# Altium PCB 175-00003, rev 2, Sinistro ASP.PcbDoc (part 5 of 5)
Units mil, origin at the board's own origin, x right, y up, seen from the top; angles counter-clockwise.
Board outline 5905.51 x 4330.71 mil, 8 copper layers (Top Layer (.GTL), MidLayer1 (.G1), +28V and VCC (.GP1), A and D grounds (.GP2), Earth GND (.GP3), +5ANA (.GP4), -5ANA (.GP5), Bottom Layer (.GBL)); 381 components, 275 nets, 1751 pads, 519 vias.
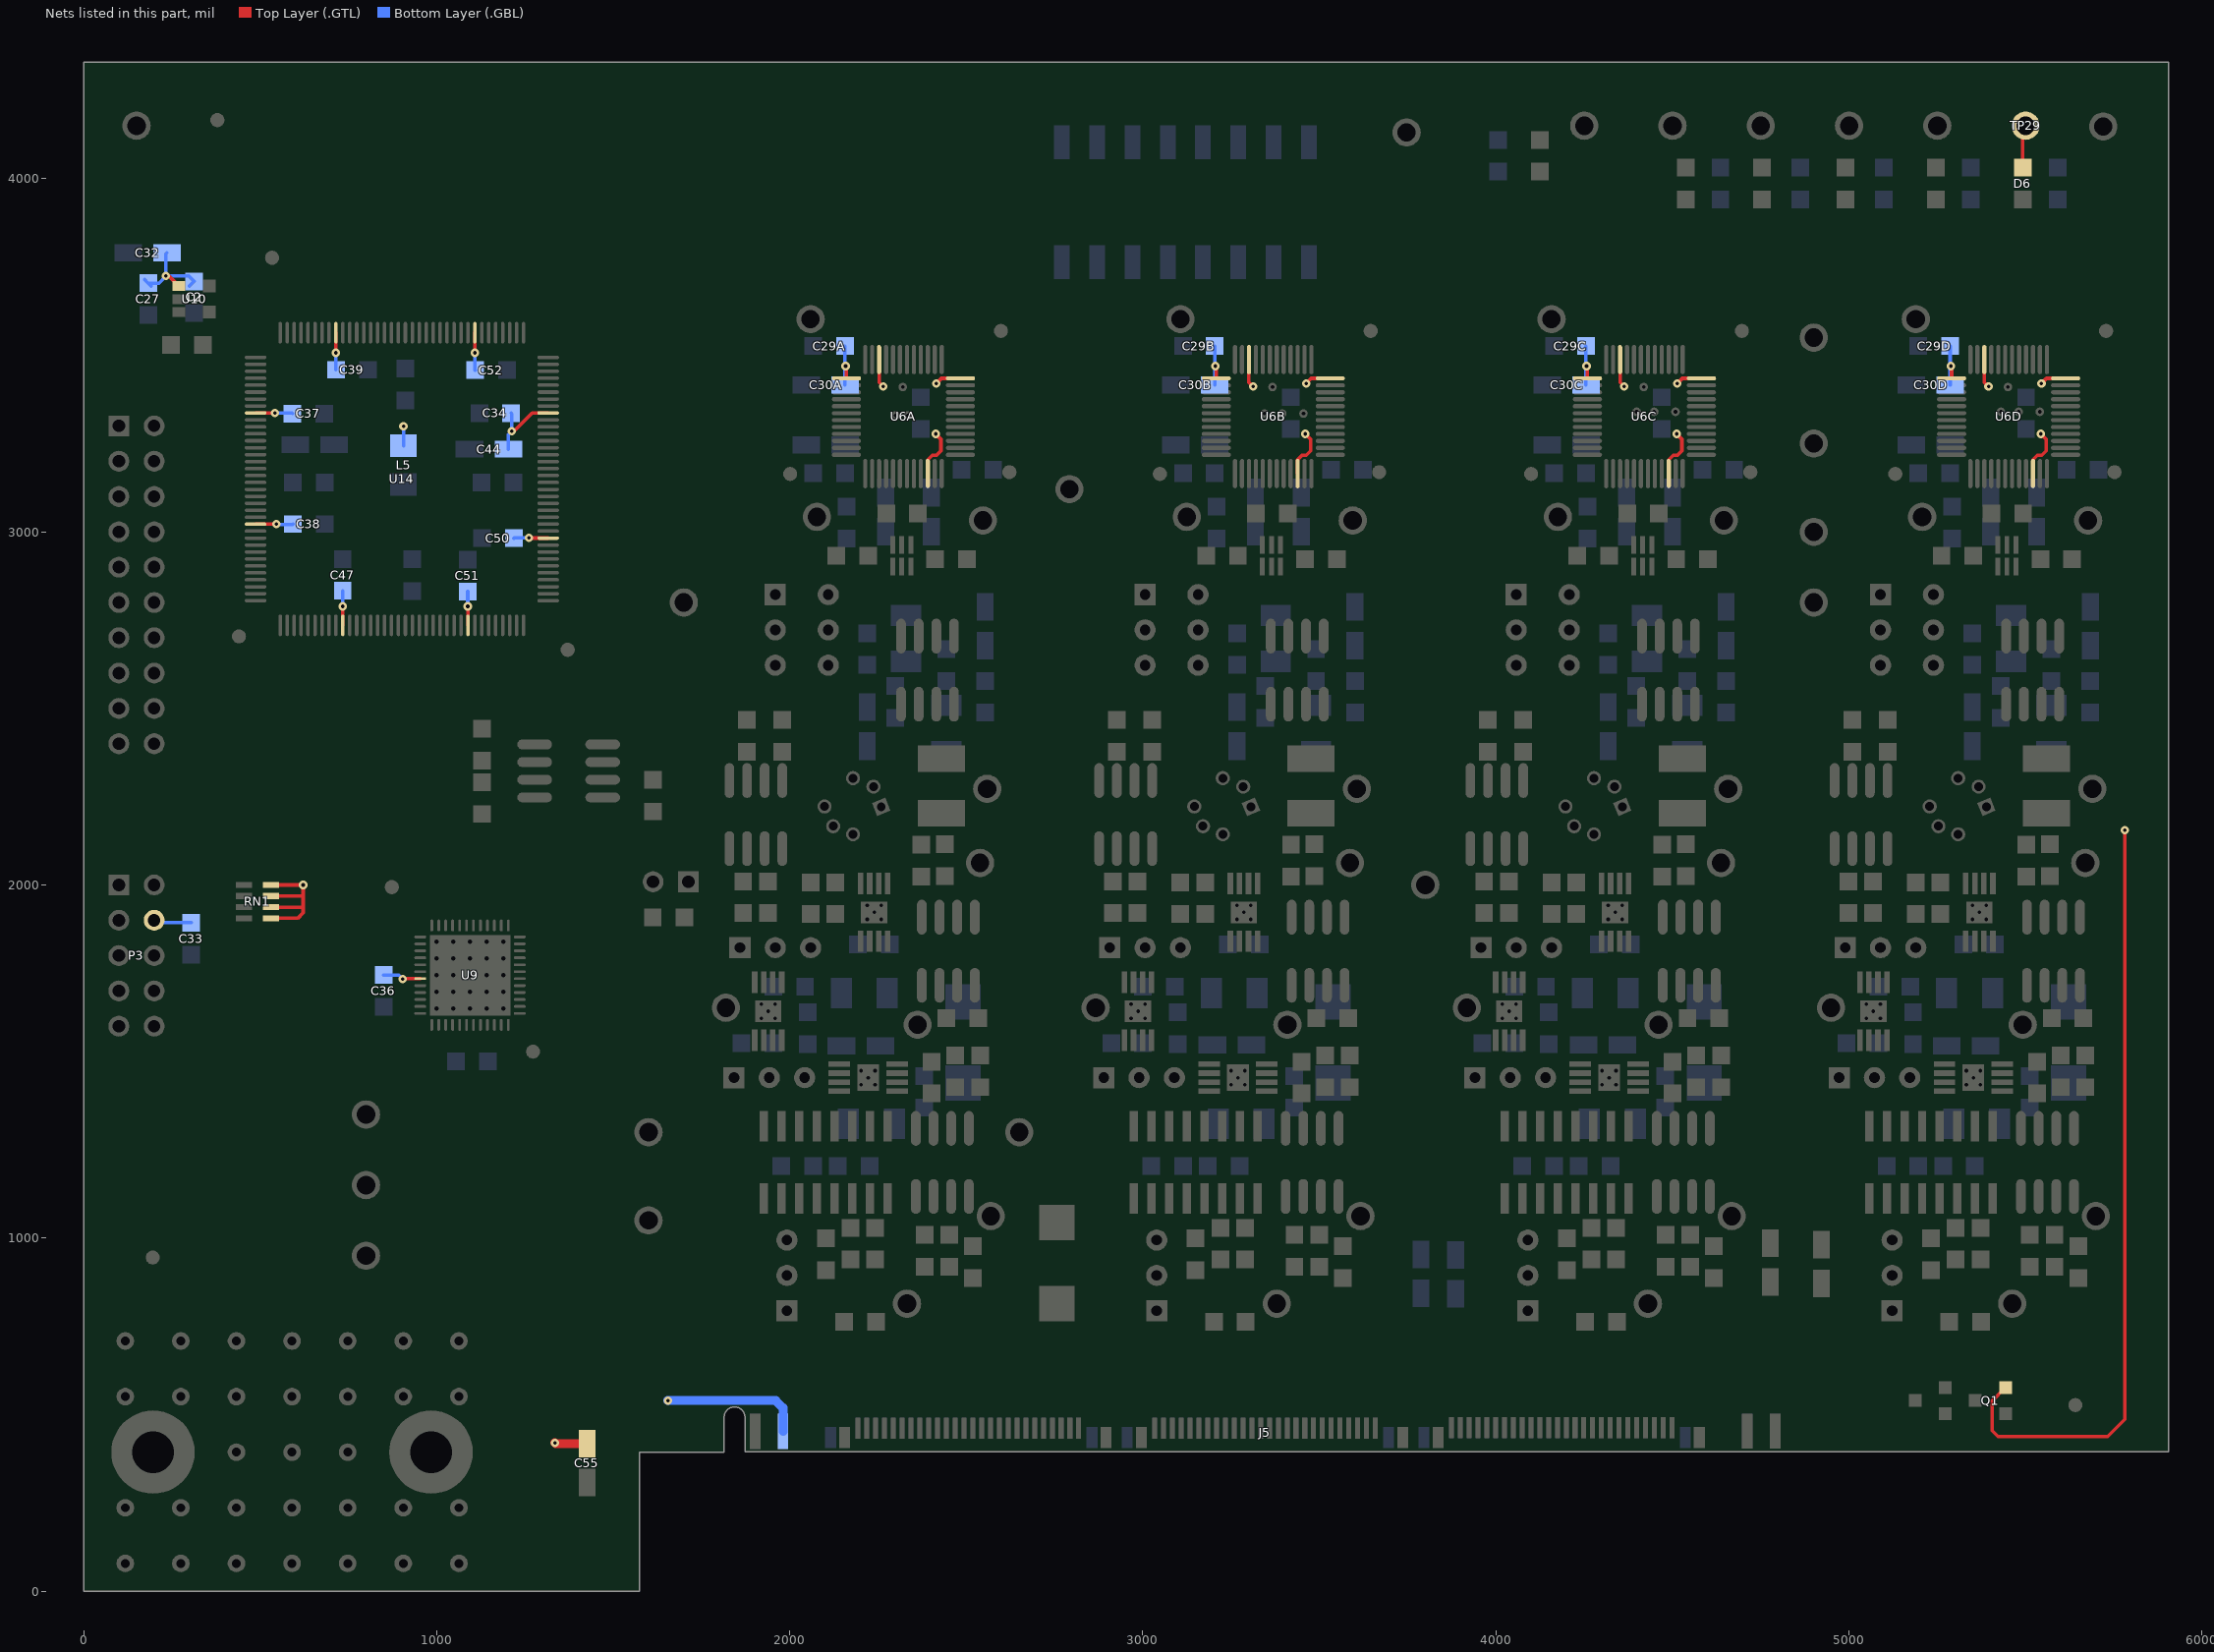
[diagram p11: the nets of this part, all layers, seen from the top]

## Via types
v1: diameter 24, hole 10, Top Layer (.GTL) to Bottom Layer (.GBL), tented both sides, 519 vias

## Nets (pads, with @x,y where several pads share a name; then routed paths per layer and width w, separated by ;. In a path a pad name is that pad's centre, name@x,y a point inside that pad or via, vN(x,y) a via of type N, cw(c..) or ccw(c..) an arc to the next point about the centre after c; other vN are vias at no path point) (continued)
VCC: C2.2 C27.2 C29A.2 C29B.2 C29C.2 C29D.2 C30A.1 C30B.1 C30C.1 C30D.1 C32.1 C33.2 C34.2 C36.2 C37.2 C38.2 C39.2 C44.1 C47.2 C50.2 C51.2 C52.2 C55.1 D6.ANOD J5.PC06 L5.2 P3.4 Q1.2 RN1.2 RN1.4 RN1.6 RN1.8 TP29.1 U6A.10 U6A.24 U6A.34 U6A.37 U6B.10 U6B.24 U6B.34 U6B.37 U6C.10 U6C.24 U6C.34 U6C.37 U6D.10 U6D.24 U6D.34 U6D.37 U9.7 U10.1 U14.9 U14.25 U14.46 U14.64 U14.82 U14.100 U14.116 U14.136 | length 6727.2
  Top Layer (.GTL) w10: v1(233.15,3724.25) 242.15,3724.25 U10.1@270.15,3696.25 ; U14.25@487.21,3021.65 v1(546.35,3021.65) ; U14.9@487.21,3336.61 487.82,3336 v1(542,3336) ; RN1.8@530.71,1905.51 606.51,1905.51 622,1921 622,1936 ; RN1.6@530.71,1937.01 620.99,1937.01 622,1936 ; RN1.4@530.71,1968.5 621.5,1968.5 622,1968 ; RN1.2@530.71,2000 v1(622,2000) 622,1968 ; v1@714.57,3505.43 U14.136@714.57,3563.98 ; v1(734,2789) 734.25,2788.75 U14.46@734.25,2735.24 ; v1(904,1734) 904.65,1734.65 U9.7@953.74,1734.65 ; v1(1088,2789) 1088.58,2788.42 U14.64@1088.58,2735.24 ; v1(1108,3507) 1108.27,3507.27 U14.116@1108.27,3563.98 ; v1(1213,3285) 1219,3285 1270.61,3336.61 U14.100@1315.95,3336.61 ; v1(1261,2983) 1261.72,2982.28 U14.82@1315.95,2982.28 ; v1(2158.09,3469.32) 2160.68,3466.74 U6A.37@2160.68,3434.59 ; U6A.34@2253.2,3448.08 U6A.34@2253.2,3487.74 2253.2,3423.22 v1(2265.09,3411.32) ; U6A.10@2390.99,3164.9 2390.99,3204.56 2403.67,3217.24 2415.71,3217.24 2428.09,3229.62 2428.09,3262.32 v1(2413.09,3277.32) ; v1(2415.09,3420.32) 2429.36,3434.59 U6A.24@2483.51,3434.59 ; v1(3205.34,3469.32) 3207.92,3466.74 U6B.37@3207.92,3434.59 ; U6B.34@3300.44,3448.08 U6B.34@3300.44,3487.74 3300.44,3423.22 v1(3312.34,3411.32) ; U6B.10@3438.24,3164.9 3438.24,3204.56 3450.92,3217.24 3462.96,3217.24 3475.34,3229.62 3475.34,3262.32 v1(3460.34,3277.32) ; v1(3462.34,3420.32) 3476.61,3434.59 U6B.24@3530.76,3434.59 ; v1(4256.52,3469.32) 4259.1,3466.74 U6C.37@4259.1,3434.59 ; U6C.34@4351.62,3448.08 U6C.34@4351.62,3487.74 4351.62,3423.22 v1(4363.52,3411.32) ; U6C.10@4489.42,3164.9 4489.42,3204.56 4502.1,3217.24 4514.14,3217.24 4526.52,3229.62 4526.52,3262.32 v1(4511.52,3277.32) ; v1(4513.52,3420.32) 4527.79,3434.59 U6C.24@4581.94,3434.59 ; v1(5288.02,3469.32) 5290.6,3466.74 U6D.37@5290.6,3434.59 ; U6D.34@5383.12,3448.08 U6D.34@5383.12,3487.74 5383.12,3423.22 v1(5395.02,3411.32) ; Q1.2@5443,577 5405,539 5405,455 5422,438 5732,438 5781,487 v1(5781,2155) ; D6.ANOD@5492.13,4031.22 5492.13,4142.12 TP29.1@5500,4150 ; U6D.10@5520.91,3164.9 5520.91,3204.56 5533.6,3217.24 5545.64,3217.24 5558.02,3229.62 5558.02,3262.32 v1(5543.02,3277.32) ; v1(5545.02,3420.32) 5559.28,3434.59 U6D.24@5613.43,3434.59 ; 622,1936 622,1968
  Top Layer (.GTL) w25: v1(1335,420) 1337,418 C55.1@1426,418
  Bottom Layer (.GBL) w10: C27.2@173.15,3714.25 C27.2@183.15,3704.25 ; C27.2@191.15,3696.25 C27.2@183.15,3704.25 ; P3.4@200,1900 207,1893 C33.2@305,1893 ; C32.1@236,3790 233.15,3787.15 v1(233.15,3724.25) ; C2.2@300.15,3696.25 C2.2@313.15,3709.25 298.15,3724.25 v1(233.15,3724.25) ; v1(542,3336) 591,3336 C37.2@592,3335 ; v1(546.35,3021.65) 547,3021 592,3021 C38.2@593,3022 ; v1(714,3507) 715,3506 C39.2@715,3459 ; v1(734,2789) C47.2@734,2833 ; C36.2@850,1745 893,1745 v1(904,1734) ; L5.2@906,3244 v1(906,3299) ; v1(1088,2789) C51.2@1088,2831 ; v1(1108,3507) 1108,3459 C52.2@1109,3458 ; C44.1@1203,3234 1203,3275 v1(1213,3285) 1213,3334 C34.2@1211,3336 ; C50.2@1219,2982 1220,2983 v1(1261,2983) ; C30A.1@2156.36,3416.05 C29A.2@2156.36,3526.05 ; C30B.1@3203.61,3416.05 C29B.2@3203.61,3526.05 ; C30C.1@4254.79,3416.05 C29C.2@4254.79,3526.05 ; C30D.1@5286.28,3416.05 C29D.2@5286.28,3526.05 ; C27.2@183.15,3704.25 213.15,3704.25 v1(233.15,3724.25)
  Bottom Layer (.GBL) w25: v1(1655,540) 1960,540 1980.91,519.09 J5.PC06@1980.91,452.85
pads on no net: J5.0 J5.4 J5.6 J5.8 J5.10 J5.14 J5.16 J5.18 J5.20 J5.23 J5.24 J5.25 J5.26 J5.27 J5.28 J5.29 J5.30 J5.33 J5.34 J5.35 J5.36 J5.37 J5.38 J5.39 J5.40 J5.44 J5.46 J5.48 J5.50 J5.55 J5.56 J5.57 J5.58 J5.59 J5.60 J5.61 J5.62 J5.65 J5.66 J5.67 J5.68 J5.69 J5.70 J5.71 J5.72 J5.75 J5.76 J5.77 J5.78 J5.79 J5.80 J5.82 J5.85 J5.86 J5.87 J5.88 J5.90 J5.91 J5.92 J5.95 J5.96 J5.97 J5.101 J5.107 J5.108 J5.109 J5.110 J5.111 J5.112 J5.113 J5.114 J5.117 J5.118 J5.119 J5.121 J5.122 J5.123 J5.124 J5.127 J5.128 J5.129 J5.130 J5.131 J5.132 J5.133 J5.134 J5.137 J5.139 J5.141 P1.6 P1.8 P1.10 P1.12 P1.14 P1.16 P1.18 P1.19 P1.20 P3.6 P3.7 P3.8 SW1.1 SW1.2 SW1.15 SW1.16 U1A.1 U1A.5 U1A.8 U1B.1 U1B.5 U1B.8 U1C.1 U1C.5 U1C.8 U1D.1 U1D.5 U1D.8 U4A.1 U4A.5 U4A.8 U4B.1 U4B.5 U4B.8 U4C.1 U4C.5 U4C.8 U4D.1 U4D.5 U4D.8 U5A.1 U5A.5 U5A.8 U5B.1 U5B.5 U5B.8 U5C.1 U5C.5 U5C.8 U5D.1 U5D.5 U5D.8 U6A.2 U6A.11 U6B.2 U6B.11 U6C.2 U6C.11 U6D.2 U6D.11 U7A.7 U7B.7 U7C.7 U7D.7 U8.1 U8.5 U8.7 U8.8 U9.1 U9.2 U9.3 U9.4 U9.5 U9.6 U9.16 U9.17 U9.20 U9.21 U9.22 U9.23 U9.24 U9.25 U9.26 U9.29 U9.30 U9.31 U9.32 U9.35 U9.38 U9.39 U9.40 U9.41 U9.42 U9.43 U9.44 U9.45 U9.46 U9.47 U9.48 U11A.4 U11A.5 U11B.4 U11B.5 U11C.4 U11C.5 U11D.4 U11D.5 U13A.4 U13A.5 U13B.4 U13B.5 U13C.4 U13C.5 U13D.4 U13D.5 U14.15 U14.24 U14.29 U14.30 U14.31 U14.32 U14.45 U14.48 U14.49 U14.50 U14.51 U14.52 U14.53 U14.55 U14.57 U14.58 U14.59 U14.60 U14.62 U14.63 U14.66 U14.67 U14.68 U14.69 U14.70 U14.71
copper on no net: | length 235.3
  Bottom Layer (.GBL) w5: 2526.44,4051 ccw(c2489,4051) 2526.44,4051

## Polygon pours and split planes (outlines as drawn)
+28V on +28V and VCC (.GP1) (split plane): 5877.86,1995.18 5883.39,1994.24 5885.41,1994.12 5885.41,414.61 1899.08,414.61 1899.08,1995.92 5875.27,1995.92
VCC on +28V and VCC (.GP1) (split plane): 5885.41,2096.08 1849,2096.08 1843.39,2095.76 1837.86,2094.82 1832.46,2093.27 1827.27,2091.12 1822.36,2088.4 1817.78,2085.15 1813.59,2081.41 1809.85,2077.22 1806.6,2072.64 1803.88,2067.73 1801.73,2062.54 1800.18,2057.14 1799.24,2051.61 1798.92,2046 1798.92,513.49 1796.86,508.51 1795.32,503.16 1794.38,497.68 1794.1,492.57 1794.05,492.13 1794.05,413.8 1574.8,413.8 1570.88,413.41 1567.11,412.27 1563.64,410.41 1560.59,407.91 1558.09,404.87 1556.24,401.39 1555.09,397.62 1554.71,393.7 1554.71,20.1 20.1,20.1 20.1,4310.61 5885.41,4310.61
A on A and D grounds (.GP2) (split plane): 5885.41,726.07 1679.07,726.07 1679.07,2105 1678.78,2107.94 1677.93,2110.77 1676.53,2113.37 1674.66,2115.66 1673.56,2116.56 1672.66,2117.66 1670.37,2119.53 1667.77,2120.93 1664.94,2121.78 1662,2122.07 976.07,2122.07 976.07,2564.93 1666,2564.93 1668.94,2565.22 1671.77,2566.07 1674.37,2567.47 1676.66,2569.34 1678.46,2571.54 1680.66,2573.34 1682.53,2575.63 1683.93,2578.23 1684.78,2581.06 1685.07,2584 1685.07,4298 1684.78,4300.94 1683.93,4303.77 1682.53,4306.37 1680.66,4308.66 1678.37,4310.53 1678.23,4310.61 5885.41,4310.61
GND on A and D grounds (.GP2) (split plane): 1661.63,4310.53 1659.34,4308.66 1657.47,4306.37 1656.07,4303.77 1655.22,4300.94 1654.93,4298 1654.93,2595.07 963,2595.07 960.06,2594.78 957.23,2593.93 954.63,2592.53 952.34,2590.66 951.44,2589.56 950.34,2588.66 948.47,2586.37 947.07,2583.77 946.22,2580.94 945.93,2578 945.93,2109 946.22,2106.06 947.07,2103.23 948.47,2100.63 950.34,2098.34 951.44,2097.44 952.34,2096.34 954.63,2094.47 957.23,2093.07 960.06,2092.22 963,2091.93 1648.93,2091.93 1648.93,711 1649.22,708.06 1650.07,705.23 1651.47,702.63 1653.34,700.34 1655.63,698.47 1658.23,697.07 1661.06,696.22 1664,695.93 5885.41,695.93 5885.41,414.61 1893.3,414.61 1893.3,492.13 1893.26,492.57 1892.97,497.68 1892.04,503.16 1890.5,508.51 1888.37,513.65 1885.68,518.52 1882.46,523.05 1878.76,527.2 1874.61,530.91 1870.07,534.13 1865.2,536.82 1860.06,538.95 1854.72,540.49 1849.23,541.42 1843.68,541.73 1838.12,541.42 1832.64,540.49 1827.3,538.95 1822.16,536.82 1817.29,534.13 1812.75,530.91 1808.6,527.2 1804.9,523.05 1801.68,518.52 1798.99,513.65 1796.86,508.51 1795.32,503.16 1794.38,497.68 1794.1,492.57 1794.05,492.13 1794.05,413.8 1574.8,413.8 1570.88,413.41 1567.11,412.27 1563.64,410.41 1560.59,407.91 1558.09,404.87 1556.24,401.39 1555.09,397.62 1554.71,393.7 1554.71,20.1 20.1,20.1 20.1,4310.61 1661.77,4310.61
E on Earth GND (.GP3) (split plane): 5885.41,414.61 1893.3,414.61 1893.3,492.13 1893.26,492.57 1892.97,497.68 1892.04,503.16 1890.5,508.51 1888.37,513.65 1885.68,518.52 1882.46,523.05 1878.76,527.2 1874.61,530.91 1870.07,534.13 1865.2,536.82 1860.06,538.95 1854.72,540.49 1849.23,541.42 1843.68,541.73 1838.12,541.42 1832.64,540.49 1827.3,538.95 1822.16,536.82 1817.29,534.13 1812.75,530.91 1808.6,527.2 1804.9,523.05 1801.68,518.52 1798.99,513.65 1796.86,508.51 1795.32,503.16 1794.38,497.68 1794.1,492.57 1794.05,492.13 1794.05,413.8 1574.8,413.8 1570.88,413.41 1567.11,412.27 1563.64,410.41 1560.59,407.91 1558.09,404.87 1556.24,401.39 1555.09,397.62 1554.71,393.7 1554.71,20.1 20.1,20.1 20.1,4310.61 5885.41,4310.61
+5ANA on +5ANA (.GP4) (split plane): 5885.41,414.61 1893.3,414.61 1893.3,492.13 1893.26,492.57 1892.97,497.68 1892.04,503.16 1890.5,508.51 1888.37,513.65 1885.68,518.52 1882.46,523.05 1878.76,527.2 1874.61,530.91 1870.07,534.13 1865.2,536.82 1860.06,538.95 1854.72,540.49 1849.23,541.42 1843.68,541.73 1838.12,541.42 1832.64,540.49 1827.3,538.95 1822.16,536.82 1817.29,534.13 1812.75,530.91 1808.6,527.2 1804.9,523.05 1801.68,518.52 1798.99,513.65 1796.86,508.51 1795.32,503.16 1794.38,497.68 1794.1,492.57 1794.05,492.13 1794.05,413.8 1574.8,413.8 1570.88,413.41 1567.11,412.27 1563.64,410.41 1560.59,407.91 1558.09,404.87 1556.24,401.39 1555.09,397.62 1554.71,393.7 1554.71,20.1 20.1,20.1 20.1,4310.61 5885.41,4310.61
-5ANA on -5ANA (.GP5) (split plane): 5885.41,414.61 1893.3,414.61 1893.3,492.13 1893.26,492.57 1892.97,497.68 1892.04,503.16 1890.5,508.51 1888.37,513.65 1885.68,518.52 1882.46,523.05 1878.76,527.2 1874.61,530.91 1870.07,534.13 1865.2,536.82 1860.06,538.95 1854.72,540.49 1849.23,541.42 1843.68,541.73 1838.12,541.42 1832.64,540.49 1827.3,538.95 1822.16,536.82 1817.29,534.13 1812.75,530.91 1808.6,527.2 1804.9,523.05 1801.68,518.52 1798.99,513.65 1796.86,508.51 1795.32,503.16 1794.38,497.68 1794.1,492.57 1794.05,492.13 1794.05,413.8 1574.8,413.8 1570.88,413.41 1567.11,412.27 1563.64,410.41 1560.59,407.91 1558.09,404.87 1556.24,401.39 1555.09,397.62 1554.71,393.7 1554.71,20.1 20.1,20.1 20.1,4310.61 5885.41,4310.61

## Other copper
Top Layer (.GTL):
  rectangle net E: 0,0 1181.1,787.4
  text "FOR NEXT REV:" at 8019,2330 h200
  text "CONNECT R13 PAD TO +28V 4PLCS" at 7032,1787 h200
  text "BOARD HOUSE CORRECTED PROBLEM FOR REV 2" at 6884,1343 h200
  text "*.GTL - TOP LAYER GERBER DATA" at 1100,-1620 h80
MidLayer1 (.G1):
  text "*.G1 - MID LAYER 1 GERBER DATA" at 1100,-1620 h80
Bottom Layer (.GBL):
  region net E: 1181.1,787.4 0,787.4 0,0 1181.1,0
  text "175-00003, REV 2" at 2518,4208 h40
  text "PCB, SINISTRO ANALOG SIGNAL PROCESSOR" at 2526,4124 h40
  text "c  2012 Las Cumbres Observatory" at 2503,4038 h40
  text "*.GBL - BOTTOM LAYER GERBER DATA" at 1100,-1620 h80
A and D grounds (.GP2) (plane layer: these items are gaps in the copper):
  lines w30: 961,2109 961,2578 ; 963,2107 1662,2107 ; 963,2580 1666,2580 ; 1664,2105 1664,711 5902.51,711 ; 1670,2584 1670,4298
  text "*.GP2 - INTERNAL PLANE LAYER 2 GERBER DATA" at 1100,-1620 h80
+5ANA (.GP4) (plane layer: these items are gaps in the copper):
  text "*.GP4 - INTERNAL PLANE LAYER 4 GERBER DATA" at 1100,-1620 h80
-5ANA (.GP5) (plane layer: these items are gaps in the copper):
  text "*.GP5 - INTERNAL PLANE LAYER 5 GERBER DATA" at 1100,-1620 h80
+28V and VCC (.GP1) (plane layer: these items are gaps in the copper):
  lines w100: 1849,400 1849,2046 5583,2046 5887,2046 5889,2044
  text "*.GP1- INTERNAL PLANE LAYER 1 GERBER DATA" at 1100,-1620 h80
Earth GND (.GP3) (plane layer: these items are gaps in the copper):
  text "*.GP3- INTERNAL PLANE LAYER 3 GERBER DATA" at 1100,-1620 h80

## Silkscreen, mask and mechanical layers (free items; w line width, h text height)
Top Overlay:
  rectangle: 2247,4071 2477,4223
  text "+5ANA" at 4937.01,4283.46 h30
  text "+12V" at 4448.82,4279.53 h30
  text "-12V" at 4696.85,4279.53 h30
  text "-5ANA" at 5173.23,4279.53 h30
  text "VCC" at 5460.63,4279.53 h30
  text "+28V" at 4185.04,4271.65 h30
  text "AGND" at 3704.72,4208.66 h30
  text "780-00002 REV:" at 1537,4112 h50
  text "DGND" at 102.36,4039.37 h30
  text "AGND" at 5673.23,4035.43 h30
  text "SCH, SINISTRO ANALOG SIGNAL PROCESSOR" at 1532,3984 h50
  text "AGND" at 2736.22,3185.04 h30
  text "/CONVST" at 4803.15,3161.42 h30
  text "DGND" at 1539.37,2070.87 h30
  text "AGND" at 1685.04,2070.87 h30
  text "AGND" at 3740.16,1901.57 h30
  text "JTAG" at 75,1375 h50
  text "/CKT_TEST" at 1405.51,1358.27 h30
  text "SCLK" at 606.3,1342.52 h30
  text "DC HOLD" at 2657.48,1216.54 h30
  text "SIMO" at 614.17,1133.86 h30
  text "/GAIN 4X" at 1381.89,1106.3 h30
  text "SOMI" at 610.24,933.07 h30
  text "*.GTO - TOP OVERLAY GERBER DATA" at 1100,-1620 h80
Bottom Overlay:
  text "*GBO BOTTOM OVERLAY GERBER DATA" at 1100,-1620 h80
Top Paste:
  text "*.GTP - TOP-SIDE SOLDER PASTE MASK" at 1099.99,-1619.99 h80
Bottom Paste:
  text "*.GBP - BOTTOM-SIDE SOLDER PASTE MASK" at 1099.99,-1619.99 h80
Top Solder:
  rectangle: 0,0 1181.1,787.4
  text "*.GTS - TOP SOLDER MASK GERBER DATA" at 1100,-1620 h80
Bottom Solder:
  rectangle: 0,0 1181.1,787.4
  rectangle: 1037,3984 2542,4272
  text "*.GBS - BOTTOM SOLDER MASK GERBER DATA" at 1100,-1620 h80
Mechanical 1:
  lines w29.53: 1873.21,492.13 1873.21,492.13 1873.21,394.51 5077.93,394.51 5905.51,394.51 5905.51,4330.71 1181.1,4330.71 0,4330.71 0,0 1181.1,0 1574.8,0 1574.8,393.7 1814.15,393.7 1814.15,492.13 cw(c1843.68,493) 1873.22,493
Mechanical 2:
  lines w10: -7888,-7687 -7888,8313 13112,8313 13112,-7687 -7888,-7687 ; 9057,-7581 ccw(c9107,-7581) 9107,-7631 9437,-7631 ccw(c9437,-7591) 9477,-7591 9477,-7421 ccw(c9437,-7421) 9437,-7381 9057,-7381 9057,-7581 ; 9057,-7291 ccw(c9107,-7291) 9107,-7341 13007,-7341 ccw(c13007,-7291) 13057,-7291 13057,-7101 ccw(c13007,-7101) 13007,-7051 9057,-7051 9057,-7291 ; 9057,-6961 ccw(c9107,-6961) 9107,-7011 10987,-7011 ccw(c10987,-6961) 11037,-6961 11037,-6811 ccw(c10987,-6811) 10987,-6761 9057,-6761 9057,-6961 ; 9057,-6681 ccw(c9097,-6681) 9097,-6721 9907,-6721 ccw(c9907,-6671) 9957,-6671 9957,-6521 ccw(c9907,-6521) 9907,-6471 9057,-6471 9057,-6681 ; 9517,-7591 ccw(c9557,-7591) 9557,-7631 11517,-7631 ccw(c11517,-7591) 11557,-7591 11557,-7421 ccw(c11517,-7421) 11517,-7381 9517,-7381 9517,-7591 ; 9997,-6671 ccw(c10047,-6671) 10047,-6721 10987,-6721 ccw(c10987,-6671) 11037,-6671 11037,-6521 ccw(c10987,-6521) 10987,-6471 9997,-6471 9997,-6671 ; 11077,-6961 ccw(c11127,-6961) 11127,-7011 13007,-7011 ccw(c13007,-6961) 13057,-6961 13057,-6811 ccw(c13007,-6811) 13007,-6761 11077,-6761 11077,-6961 ; 11077,-6671 ccw(c11127,-6671) 11127,-6721 12067,-6721 ccw(c12067,-6671) 12117,-6671 12117,-6521 ccw(c12067,-6521) 12067,-6471 11077,-6471 11077,-6671 ; 11597,-7581 ccw(c11647,-7581) 11647,-7631 11977,-7631 ccw(c11977,-7591) 12017,-7591 12017,-7421 ccw(c11977,-7421) 11977,-7381 11597,-7381 11597,-7581 ; 12057,-7591 ccw(c12097,-7591) 12097,-7631 13007,-7631 ccw(c13007,-7581) 13057,-7581 13057,-7431 ccw(c13007,-7431) 13007,-7381 12057,-7381 12057,-7591 ; 12157,-6671 ccw(c12207,-6671) 12207,-6721 13007,-6721 ccw(c13007,-6671) 13057,-6671 13057,-6521 ccw(c13007,-6521) 13007,-6471 12157,-6471 12157,-6671
  lines w15: -7227,-2595.3 -2326,-2595.3 ; -7227,-2317.9 -2326,-2317.9 ; -7287,-4768 ccw(c-7197,-4768) -7197,-4858 -2356,-4858 ccw(c-2356,-4768) -2266,-4768 -2266,-2129 ccw(c-2356,-2129) -2356,-2039 -7197,-2039 ccw(c-7197,-2129) -7287,-2129 -7287,-4768
  lines w20: -7867.94,-7041.12 cw(c-7818,-7116) -7818,-7026 -7358,-7026 cw(c-7358,-7116) -7268,-7116 -7268,-7166 ccw(c-7258,-7166) -7258,-7176 -4618,-7176 cw(c-4618,-7266) -4528,-7266 -4528,-7606 cw(c-4618,-7606) -4543.12,-7655.94 ; 9013.17,-7670.98 cw(c9107,-7581) 8977,-7581 8977,-5911 cw(c9107,-5911) 9107,-5781 13007,-5781 cw(c13007,-5911) 13095.66,-5815.92 ; -7868,-7606 ccw(c-7818,-7606) -7818,-7656 -4618,-7656 ccw(c-4618,-7606) -4568,-7606 -4568,-7266 ccw(c-4618,-7266) -4618,-7216 -7258,-7216 cw(c-7258,-7166) -7308,-7166 -7308,-7116 ccw(c-7358,-7116) -7358,-7066 -7818,-7066 ccw(c-7818,-7116) -7868,-7116 -7868,-7606 ; -358,-7507 ccw(c-228,-7507) -228,-7637 4512,-7637 ccw(c4512,-7507) 4642,-7507 4642,-5917 ccw(c4512,-5917) 4512,-5787 -228,-5787 ccw(c-228,-5917) -358,-5917 -358,-7507 ; 9017,-7581 ccw(c9107,-7581) 9107,-7671 13007,-7671 ccw(c13007,-7581) 13097,-7581 13097,-5911 ccw(c13007,-5911) 13007,-5821 9107,-5821 ccw(c9107,-5911) 9017,-5911 9017,-7581
  lines w24: 2192,-7477 2342,-7477 ; 2192,-7227 2342,-7227 ; 2192,-6977 2342,-6977 ; 2192,-6727 2342,-6727 ; 2192,-6477 2342,-6477
  lines w30: -8388,-8187 -8388,8813 13612,8813 13612,-8187 -8388,-8187
  lines w50: 9202,-6322 10852,-6322 ; 9202,-5942 10852,-5942 ; 10852,-6322 10852,-5942 ; 10852,-6322 9192,-6322 9192,-5942 10852,-5942
  text "NOTES (UNLESS OTHERWISE SPECIFIED):" at -7568,7789 h90
  text "GENERAL" at -7468,7589 h90
  text "1)" at -7368,7388.95 h75
  text "PCB IS 8-LAYER, .062\" THICK." at -7168,7388.97 h75
  text "2)" at -7368,7238.95 h75
  text "CONSTRUCTION IS SOLDER-MASK-OVER-BARE-COPPER (SMOBC)." at -7168,7238.95 h75
  text "3)" at -7368,7088.95 h75
  text "ACCEPTABILITY SHALL BE BASED ON IPC-A-600, CLASS 2." at -7168,7088.95 h75
  text "4)" at -7368,6938.95 h75
  text "THE FOLLOWING GERBER RS274X PHOTO TOOL FILES SHALL BE USED TO DEFINE ALL CIRCUIT FEATURES:" at -7168,6938.95 h75
  text "*.GTL - TOP LAYER GERBER DATA" at -7137,6683 h80
  text "*.G1 - MID LAYER 1 GERBER DATA" at -7137,6503.13 h80
  text "*.GP1- INTERNAL PLANE LAYER 1 GERBER DATA" at -7137,6296.59 h80
  text "*.GP2 - INTERNAL PLANE LAYER 2 GERBER DATA" at -7137,6116.72 h80
  text "*.GP3- INTERNAL PLANE LAYER 3 GERBER DATA" at -7137,5936.85 h80
  text "*.GP4 - INTERNAL PLANE LAYER 4 GERBER DATA" at -7137,5756.98 h80
  text "*.GP5 - INTERNAL PLANE LAYER 5 GERBER DATA" at -7137,5577.1 h80
  text "*.GBL - BOTTOM LAYER GERBER DATA" at -7137,5397.23 h80
  text "*GBO BOTTOM OVERLAY GERBER DATA" at -7137,5217.36 h80
  text "*.GBP - BOTTOM-SIDE SOLDER PASTE MASK" at -7137.01,5037.48 h80
  text "*.GBS - BOTTOM SOLDER MASK GERBER DATA" at -7137,4857.62 h80
  text "*.GTO - TOP OVERLAY GERBER DATA" at -7137,4677.74 h80
  text "*.GTP - TOP-SIDE SOLDER PASTE MASK" at -7137.01,4497.86 h80
  text "*.GTS - TOP SOLDER MASK GERBER DATA" at -7126,4318 h80
  text "5)" at -7430,3989.23 h75
  text "THE PHOTO TOOL SHALL NOT BE COMPENSATED WITHOUT PRIOR ENGINEERING APPROVAL." at -7230,3989.23 h75
  text "PCB DESIGNER: RICH LOBDILL   PH (805) 880-1621  FAX (805) 961-1792." at -7230,3839.28 h75
  text "FABRICATION TOLERANCES" at -7410,3547 h90
  text "6)" at -7310,3346.95 h75
  text "END PRODUCT CONDUCTOR WIDTHS AND PAD DIAMETERS SHALL NOT VARY MORE THAN" at -7110,3346.95 h75
  text "0.002\" FROM THE 1:1 DIMENSIONS OF THE MASTER ARTWORK." at -7110,3197 h75
  text "7)" at -7310,3046.95 h75
  text "THE CONDUCTIVE PATTERN SHALL BE POSITIONED SO THAT THE LOCATION OF ANY PAD OR" at -7110,3046.95 h75
  text "LAND SHALL BE WITHIN 0.005\" DIAMETER TO THE TRUE POSITION OF THE HOLE IT CIRCUMSCRIBES." at -7110,2897 h75
  text "8)" at -7310,2746.95 h75
  text "ALL DRILL HOLE SIZES AND TOLERANCES APPLY AFTER PLATING." at -7110,2746.95 h75
  text "9)" at -7310,2596.95 h75
  text "THE MINIMUM ANNULAR RING SHALL BE 0.005\"." at -7110,2596.95 h75
  text "10)" at -7365,2446.95 h75
  text "BOW AND TWIST SHALL NOT EXCEED 0.010\" PER INCH." at -7110,2446.95 h75
  text "11)" at -7355,2296.95 h75
  text "FOR PCB ROUTING DIMENSIONS: .XXX = +/-.005\"  .XX = +/-.020\"" at -7110,2296.95 h75
  text "MATERIAL" at -7410,2097 h90
  text "12)" at -7365,1896.95 h75
  text "BASE MATERIAL IS FR4 EPOXY FIBERGLASS" at -7103,1891 h75
  text "SEE STACK-UP LEGEND FOR COPPER CLADDING CALL OUTS" at -7103,1751 h75
  text "13)" at -7365,1746.95 h75
  text "PLATING" at -7410,1547 h90
  text "14)" at -7365,1351.95 h75
  text "ALL HOLES AND CONDUCTIVE SURFACES SHALL BE PLATED WITH A MINIMUM OF 0.001\" COPPER." at -7110,1351.95 h75
  text "15)" at -7365,1201.95 h75
  text "AFTER SOLDERMASK, ALL EXPOSED HOLES AND CONDUCTIVE SURFACES SHALL BE COATED" at -7110,1201.95 h75
  text "WITH A GOLD IMMERSION PLATING TO PRESERVE SOLDERABILITY." at -7103,1051 h75
  text "COATINGS" at -7410,852 h90
  text "16)" at -7360,656.95 h75
  text "THE SOLDERMASK SHALL BE BLACK LIQUID PHOTO-IMAGEABLE PER IPC-SM-840, TYPE-B, CLASS 2." at -7110,656.95 h75
  text "17)" at -7365,506.95 h75
  text "THE SOLDERMASK REGISTRATION ALLOWANCE IS 0.003\".  THERE SHALL BE NO SOLDERMASK ON" at -7110,506.95 h75
  text "ANY SOLDER PAD OR LAND." at -7110,356.95 h75
  text "MARKING" at -7410,157 h90
  text "18)" at -7365,-38.05 h75
  text "THE LEGEND SHALL BE SCREEN-PRINTED USING PERMANENT YELLOW EPOXY INK." at -7110,-38.05 h75
  text "19)" at -7365,-188.05 h75
  text "THE SCREEN PRINTING REGISTRATION ALLOWANCE IS 0.007\".  THERE SHALL BE NO INK ON ANY" at -7110,-188.05 h75
  text "SOLDER PAD OR LAND." at -7110,-338 h75
  text "20)" at -7375,-488.05 h75
  text "THE VENDOR CODE AND UL FLAMMABILITY RATING MAY BE ETCHED IN THE FOIL OR MARKED IN" at -7110,-488.05 h75
  text "PERMANENT EPOXY INK (VENDOR'S OPTION)." at -7110,-638 h75
  text "ELECTRICAL TESTING" at -7410,-838 h90
  text "21)" at -7365,-1033.05 h75
  text "ALL BOARDS SHALL BE ELECTRICALLY TESTED TO THE SUPPLIED IPC-D-356A NET LIST" at -7110,-1033.05 h75
  text "FOR CONTINUITY, OPENS AND SHORTS." at -7110,-1183 h75
  text "Layer Stack Up Detail for: Sinistro_ASP_RevA.PcbDoc" at -7227,-2246.15 h94
  text "Layer" at -7227,-2421.4 h64
  text "Copper cladding" at -4118,-2487 h75
  text "Name" at -7227,-2549.4 h64
  text "Top Layer (.GTL)" at -7227,-2731.25 h90
  text "1/2 oz (1 oz finished)" at -4490,-2761 h90
  text "MidLayer1 (.G1)" at -7227,-2988.15 h90
  text "1/2 oz" at -4481,-3000 h90
  text "+28V and VCC (.GP1)" at -7227,-3245.05 h90
  text "1/2 oz" at -4503,-3256 h90
  text "2 oz" at -4669,-3491 h90
  text "A and D grounds (.GP2)" at -7227,-3501.95 h90
  text "2 oz" at -4682,-3730 h90
  text "Earth GND (.GP3)" at -7227,-3758.85 h90
  text "1/2 oz" at -4541,-3991 h90
  text "+5ANA (.GP4)" at -7227,-4015.75 h90
  text "1/2 oz" at -4533,-4264 h90
  text "-5ANA (.GP5)" at -7227,-4272.65 h90
  text "Bottom Layer (.GBL)" at -7227,-4529.55 h90
  text "1/2 oz (1 oz finished)" at -4545,-4541 h90
  text "Las Cumbres Observatory, Inc." at 11022,-5962 h90
  text "Las Cumbres Observatory" at 9252,-6082 h150
  text "PRIMARY PCB SPECIFICATIONS" at 89,-6097 h200
  text "6740 Cortona Dr." at 11462,-6116 h90
  text "Global Telescope Network" at 9412,-6242 h125
  text "Goleta, CA 93117" at 11412,-6266 h90
  text "(REFER TO COMPLETE SPEC LISTING AT LEFT FOR FURTHER DETAILS)" at -258,-6302 h100
  text "www.lcogt.net" at 11552,-6412 h90
  text "DATE" at 9077,-6522.8 h32
  text "DESIGNED" at 10017,-6522.8 h32
  text "DRAWN" at 11097,-6522.8 h32
  text "SCALE" at 12177,-6522.8 h32
  text "NUMBER OF LAYERS" at -158,-6552 h150
  text "8" at 3392,-6552.02 h150
  text "Rich Lobdill" at 11402,-6622 h55
  text "Rich Lobdill" at 10277,-6627 h55
  text "1 : 1" at 12462,-6641 h90
  text "12/20/2012" at 9107,-6648 h90
  text "FINISHED THICKNESS" at -158,-6802 h150
  text ".062\"" at 3217,-6802 h150
  text "CHECKED/DATE" at 9077,-6812.8 h32
  text "APPROVED/DATE" at 11097,-6812.8 h32
  text "BASE MATERIAL" at -158,-7052 h150
  text "FR4" at 3142,-7052 h150
  text "TITLE" at 9077,-7102.8 h32
  text "NOTICE" at -7813,-7211 h100
  text "175-00003, PCB, SINISTRO ASP BOARD" at 9297,-7247 h100
  text "GOLD IMMERSION" at 2648,-7269 h150
  text "PLATING TYPE" at -158,-7302 h150
  text "THIS DRAWING EMBODIES A PROPRIETARY DESIGN OWNED BY LAS CUMBRES" at -7778,-7326 h60
  text "OBSERVATORY.  IT IS SUBMITTED FOR A SPECIFIC PURPOSE UNDER A CON-" at -7778,-7426 h60
  text "SIZE" at 9077,-7432.8 h32
  text "DOC NO." at 9537,-7432.8 h32
  text "REV" at 11617,-7432.8 h32
  text "SHEET" at 12077,-7432.8 h32
  text "FIDENTIAL RELATIONSHIP, AND EXCEPT FOR PURPOSES EXPRESSLY GRANTED" at -7778,-7521 h60
  text "OF" at 12507,-7536 h60
  text "SOLDER MASK COLOR" at -158,-7552 h150
  text "BLACK" at 3267,-7552 h150
  text "1" at 12337,-7556 h100
  text "14" at 12737,-7556 h100
  text "2" at 11762,-7569 h130
  text "-" at 10092,-7571 h130
  text "GPT" at 10811.72,-7585.8 h130
  text "C" at 9212,-7587 h100
  text "IN WRITING, ALL RIGHTS ARE RESERVED BY LAS CUMBRES OBSERVATORY." at -7778,-7611 h60
Mechanical 5:
  text "175-00003, REV2, SINISTRO ASP BOARD" at 1372.03,-1152.42 h80
  text "LAS CUMBRES OBSERVATORY     12/20/2012" at 1372.03,-1302.43 h80
Drill Drawing:
  lines w10: -7888,-7687 -7888,8313 13112,8313 13112,-7687 -7888,-7687 ; 9057,-7581 ccw(c9107,-7581) 9107,-7631 9437,-7631 ccw(c9437,-7591) 9477,-7591 9477,-7421 ccw(c9437,-7421) 9437,-7381 9057,-7381 9057,-7581 ; 9057,-7291 ccw(c9107,-7291) 9107,-7341 13007,-7341 ccw(c13007,-7291) 13057,-7291 13057,-7101 ccw(c13007,-7101) 13007,-7051 9057,-7051 9057,-7291 ; 9057,-6971 ccw(c9097,-6971) 9097,-7011 10517,-7011 ccw(c10517,-6961) 10567,-6961 10567,-6811 ccw(c10517,-6811) 10517,-6761 9057,-6761 9057,-6971 ; 9517,-7591 ccw(c9557,-7591) 9557,-7631 11517,-7631 ccw(c11517,-7591) 11557,-7591 11557,-7421 ccw(c11517,-7421) 11517,-7381 9517,-7381 9517,-7591 ; 10607,-6961 ccw(c10657,-6961) 10657,-7011 12067,-7011 ccw(c12067,-6961) 12117,-6961 12117,-6811 ccw(c12067,-6811) 12067,-6761 10607,-6761 10607,-6961 ; 11597,-7581 ccw(c11647,-7581) 11647,-7631 11977,-7631 ccw(c11977,-7591) 12017,-7591 12017,-7421 ccw(c11977,-7421) 11977,-7381 11597,-7381 11597,-7581 ; 12057,-7591 ccw(c12097,-7591) 12097,-7631 13007,-7631 ccw(c13007,-7581) 13057,-7581 13057,-7431 ccw(c13007,-7431) 13007,-7381 12057,-7381 12057,-7591 ; 12157,-6961 ccw(c12207,-6961) 12207,-7011 13007,-7011 ccw(c13007,-6961) 13057,-6961 13057,-6811 ccw(c13007,-6811) 13007,-6761 12157,-6761 12157,-6961
  lines w20: -7862.94,-7056.12 cw(c-7813,-7131) -7813,-7041 -7353,-7041 cw(c-7353,-7131) -7263,-7131 -7263,-7181 ccw(c-7253,-7181) -7253,-7191 -4613,-7191 cw(c-4613,-7281) -4523,-7281 -4523,-7621 cw(c-4613,-7621) -4538.12,-7670.94 ; 9011.92,-7669.66 cw(c9107,-7581) 8977,-7581 8977,-6761 cw(c9057,-6761) 9057,-6681 13007,-6681 cw(c13007,-6811) 13095.66,-6715.92 ; -7863,-7621 ccw(c-7813,-7621) -7813,-7671 -4613,-7671 ccw(c-4613,-7621) -4563,-7621 -4563,-7281 ccw(c-4613,-7281) -4613,-7231 -7253,-7231 cw(c-7253,-7181) -7303,-7181 -7303,-7131 ccw(c-7353,-7131) -7353,-7081 -7813,-7081 ccw(c-7813,-7131) -7863,-7131 -7863,-7621 ; 9017,-7581 ccw(c9107,-7581) 9107,-7671 13007,-7671 ccw(c13007,-7581) 13097,-7581 13097,-6811 ccw(c13007,-6811) 13007,-6721 9057,-6721 ccw(c9057,-6761) 9017,-6761 9017,-7581
  lines w30: -8388,-8187 -8388,8813 13612,8813 13612,-8187 -8388,-8187
  text ".Legend" at 7498,3620 h100
  text "DESIGNED" at 9077,-6812.8 h32
  text "DRAWN" at 10627,-6812.8 h32
  text "SCALE" at 12177,-6812.8 h32
  text "Rich Lobdill" at 9563,-6909 h55
  text "Rich Lobdill" at 11124,-6911 h55
  text "1 : 1" at 12462,-6931 h90
  text "TITLE" at 9077,-7102.8 h32
  text "NOTICE" at -7808,-7226 h100
  text "175-00003, PCB, SINISTRO ASP BOARD" at 9294,-7247 h100
  text "THIS DRAWING EMBODIES A PROPRIETARY DESIGN OWNED BY LAS CUMBRES" at -7773,-7341 h60
  text "SIZE" at 9077,-7432.8 h32
  text "DOC NO." at 9537,-7432.8 h32
  text "REV" at 11617,-7432.8 h32
  text "SHEET" at 12077,-7432.8 h32
  text "OBSERVATORY.  IT IS SUBMITTED FOR A SPECIFIC PURPOSE UNDER A CON-" at -7773,-7441 h60
  text "FIDENTIAL RELATIONSHIP, AND EXCEPT FOR PURPOSES EXPRESSLY GRANTED" at -7773,-7536 h60
  text "OF" at 12507,-7536 h60
  text "2" at 12322,-7556 h100
  text "14" at 12737,-7556 h100
  text "-" at 10092,-7571 h130
  text "2" at 11757,-7571 h130
  text "C" at 9212,-7587 h120
  text "GD1" at 10912,-7587 h120
  text "IN WRITING, ALL RIGHTS ARE RESERVED BY LAS CUMBRES OBSERVATORY." at -7773,-7626 h60

## Dimensions
1830.71,551.18 to 1751.97,905.51 on Mechanical 2
1751.97,492.13 to 1515.75,393.7 on Mechanical 2
-47.24,0 to 1181.1,4330.71 on Mechanical 2
0,0 to 1574.8,-59.06 on Mechanical 2
1633.86,0 to 5944.88,393.7 on Mechanical 2
0,4389.76 to 5905.51,4370.08 on Mechanical 2
0,0 to 1843.68,521.65 on Mechanical 2

## Text inside footprints (layer, text, board x,y; h text height)
J5: Top Overlay "1" at 4515,580 h30 r90; Top Overlay "155" at 2205,565 h30 r90; Top Overlay "PC01" at 4800,535 h30 r90; Top Overlay "PC07" at 1920,530 h30 r90
P1: Top Overlay "20" at 180,2340 h50 r270; Top Overlay "19" at 80,2340 h50 r270; Top Overlay "1" at 80,3400 h50 r270; Top Overlay "2" at 180,3400 h50 r270
P3: Top Overlay "10" at 180,1540 h50 r270; Top Overlay "9" at 80,1540 h50 r270; Top Overlay "1" at 80,2080 h50 r270; Top Overlay "2" at 180,2100 h50 r270
Q10A: Top Overlay "1" at 2316.09,2245.32 h40 r180
Q10B: Top Overlay "1" at 3363.34,2245.32 h40 r180
Q10C: Top Overlay "1" at 4414.52,2245.32 h40 r180
Q10D: Top Overlay "1" at 5446.02,2245.32 h40 r180